# Altium PCB Router3.PcbDoc
Units mil, origin at the board's own origin, x right, y up, seen from the top; angles counter-clockwise.
Board outline 4035 x 1185 mil, 4 copper layers (Top Layer, Mid-Layer 1, Internal Plane 1, Bottom Layer); 56 components, 29 nets, 161 pads, 13 vias.
Unrouted connection lines stored in the file: 10.
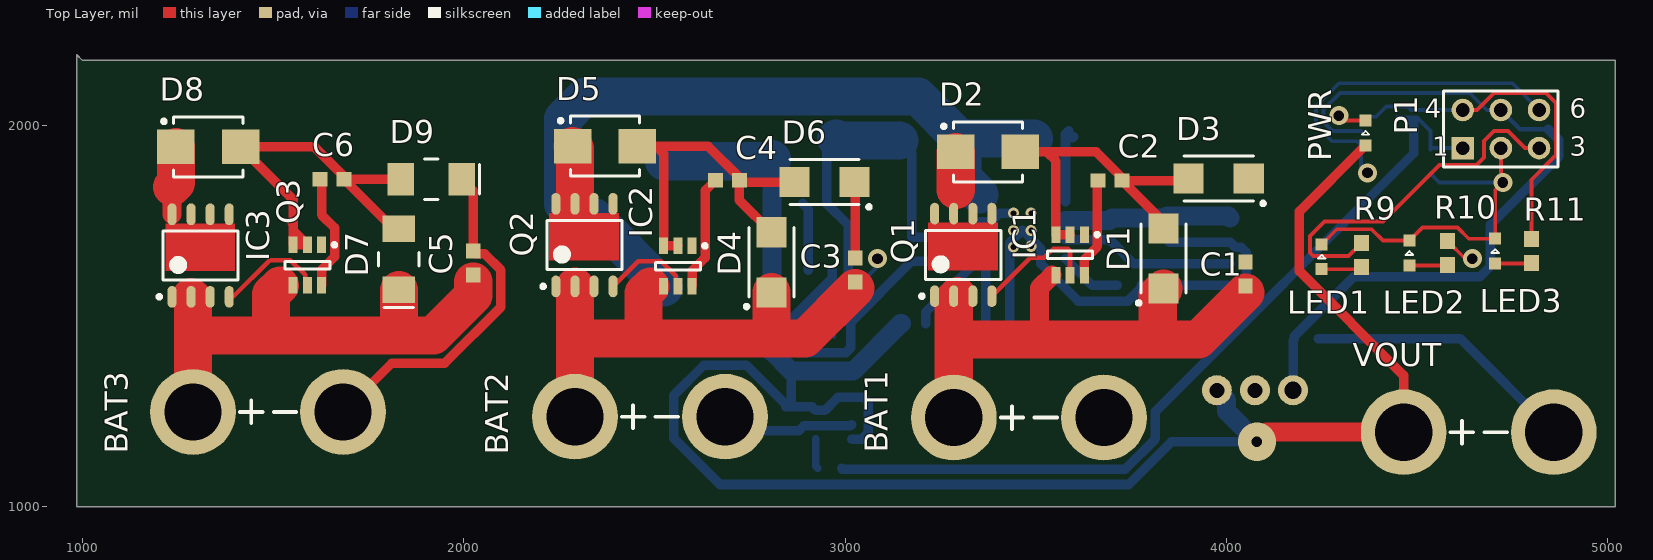
[diagram p0: Top Layer view]
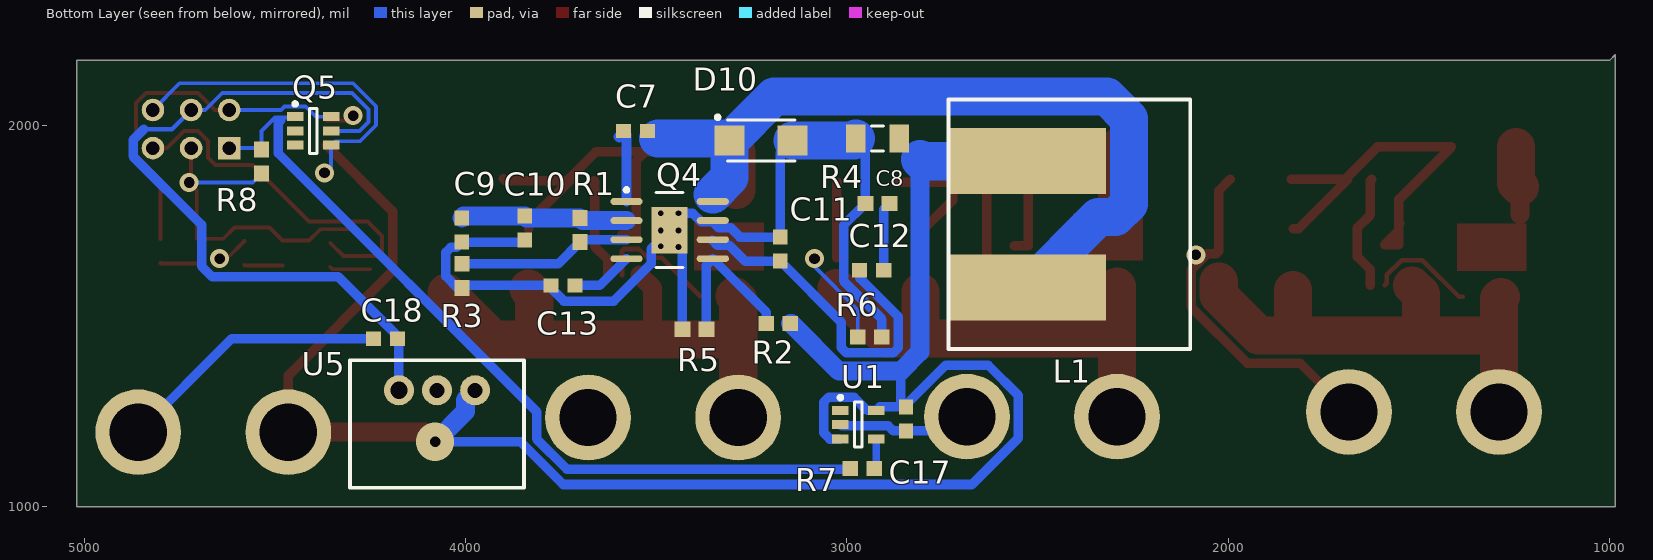
[diagram p1: Bottom Layer view, seen from below]
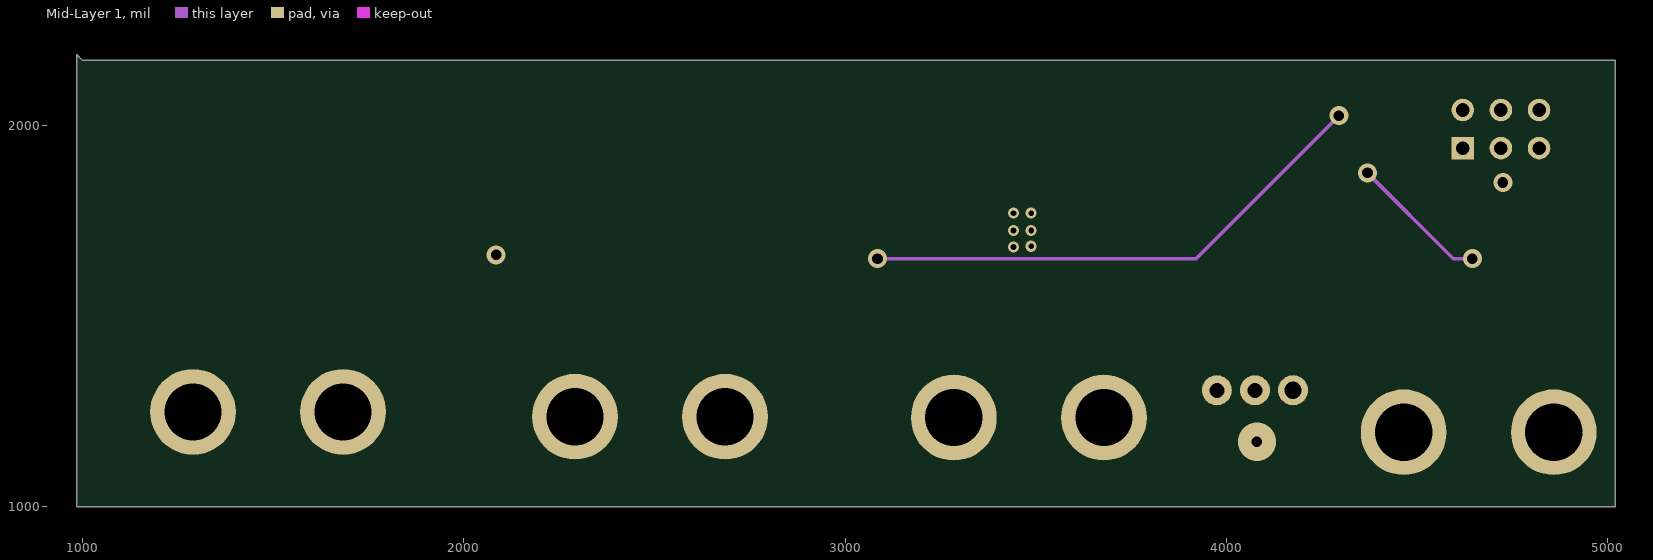
[diagram p2: Mid-Layer 1]
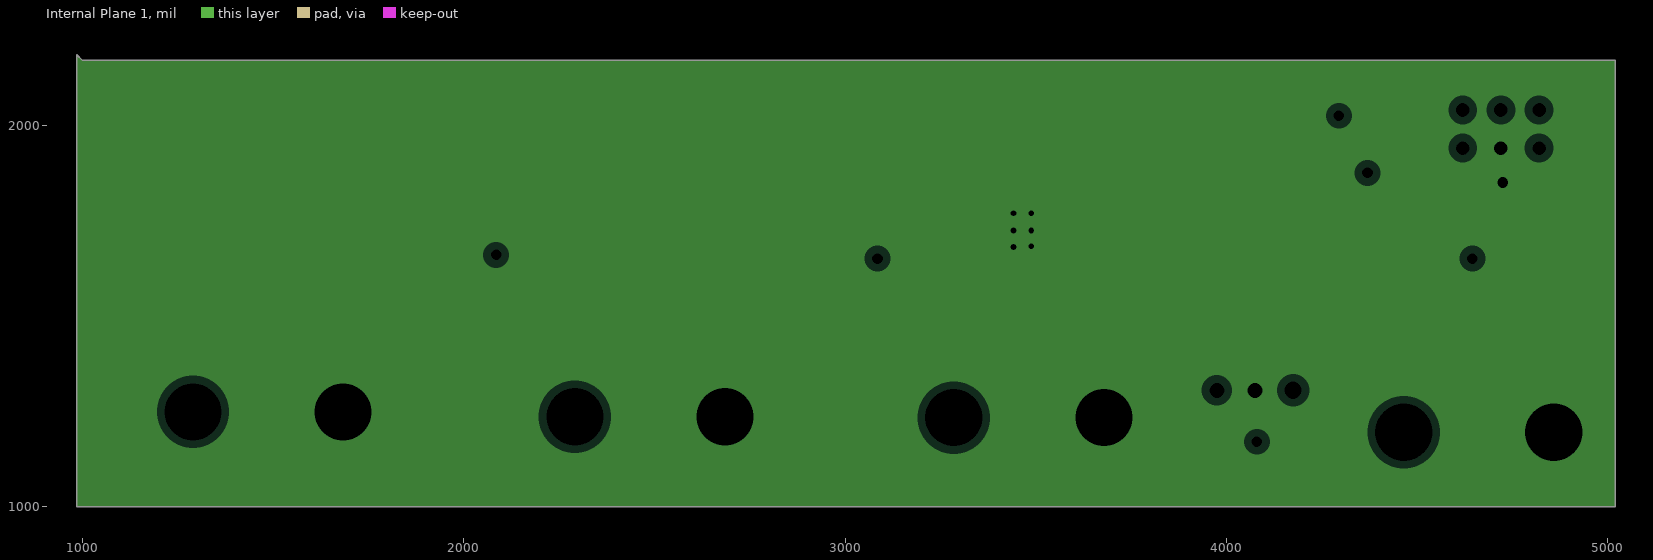
[diagram p3: Internal Plane 1, clearances drawn from the general rule]

## Layer stack, top to bottom
Top Layer: signal copper 1.4
Dielectric: core 12.6, FR-4, Dk 4.8
Mid-Layer 1: signal copper 1.4
Dielectric: prepreg 12.6, FR-4, Dk 4.8
Internal Plane 1: plane copper 1.4, net GND
Dielectric: core 12.6, FR-4, Dk 4.8
Bottom Layer: signal copper 1.4

## Board outline
985,2185 1000,2170 5020,2170 5020,1000 985,1000

## Design rules (kind name [scope] priority, off if disabled: settings)
Clearance [All] p1: gap=10
HoleSize [All] p1: absolutevalues=TRUE maxlimit=150 minlimit=1 maxpercent=80.000 minpercent=20.000
PlaneClearance [All] p1: clearance=20
PlaneConnect [All] p1: planeconnectstyle=Relief reliefexpansion=20 reliefentries=4 reliefconductorwidth=10 reliefairgap=10
PolygonConnect [All] p1: connectstyle=Relief reliefconductorwidth=10 reliefentries=4 polygonreliefangle="90 Angle" airgapwidth=10
RoutingVias [All] p1: holewidth=28 width=50 viastyle="Through Hole" minholewidth=28 minwidth=50 maxholewidth=28 maxwidth=50
SMDNeckDown [All] p1 off: percent=50.000
SilkToSolderMaskClearance [IsPad] p1: minsilkscreentomaskgap=5 clearancetoexposedcopper=TRUE
SolderMaskExpansion [All] p1: expansion=4
Width [All] p1: maxlimit=100 minlimit=10 preferedwidth=10
24 further rules are at their usual default settings.

## Classes and differential pairs
component class Switching_Regulator: C7 C8 C9 C10 C11 C12 C13 D10 L1 PWR Q4 R1 R2 R3 R4 R5 R6 VOUT
component class RouterBatteryLED: C17 C18 LED1 LED2 LED3 P1 Q5 R7 R8 R9 R10 R11 U1 U5
component class Batteries: BAT1 BAT2 BAT3 C1 C2 C3 C4 C5 C6 D1 D2 D3 D4 D5 D6 D7 D8 D9 IC1 IC2 IC3 Q1 Q2 Q3

## Components (designator, comment, footprint, x,y, rotation, side; value= is the part's Value field where it differs from the comment)
BAT1 "BATWIRE" BATWIRE12 3285.24,1233.27 r0 top
BAT2 "BATWIRE" BATWIRE12 2291.65,1235.67 r0 top
BAT3 "BATWIRE" BATWIRE12 1290,1248.27 r0 top
C1 "Cap" CAPC0603 4050,1610 r90 top
C2 "Cap" CAPC0603 3695,1855 r0 top
C3 "Cap" CAPC0603 3026.65,1620.67 r90 top
C4 "Cap" CAPC0603 2691.65,1855.67 r0 top
C5 "Cap" CAPC0603 2025,1638.27 r90 top
C6 "Cap" CAPC0603 1655,1858.27 r0 top
C7 "Cap" CAPC0603 3555,1985 r0 bottom
C8 "Cap" CAPC1206 2920,1965 r0 bottom
C9 "Cap" CAPC0603 4010,1725 r270 bottom
C10 "Cap" CAPC0603 3845,1730 r270 bottom
C11 "Cap" CAPC0603 3175,1675 r90 bottom
C12 "Cap" CAPC0603 2935,1620 r180 bottom
C13 "Cap" CAPC0603 3745,1580 r0 bottom
C17 "Cap" CAPC0603 2845,1230 r270 bottom
C18 "Cap" CAPC0603 4210,1440 r0 bottom
D1 "SS16T3G" SS16T3G 3835,1650 r90 top
D2 "SMBJ100A-13-F" SMBJ100A-13-F 3375,1930 r0 top
D3 "SS16T3G" SS16T3G 3980,1860 r180 top
D4 "SS16T3G" SS16T3G 2806.65,1640.67 r90 top
D5 "SMBJ100A-13-F" SMBJ100A-13-F 2370,1945 r0 top
D6 "SS16T3G" SS16T3G 2946.65,1850.67 r180 top
D7 "SS16T3G" SS110-TP 1830,1648.27 r90 top
D8 "SMBJ100A-13-F" SMBJ100A-13-F 1330,1943.27 r0 top
D9 "SS16T3G" SS110-TP 1915,1858.27 r180 top
D10 "DFLS160" RSX501L-20TE25 3225,1960 r180 bottom
IC1 "LM5050MK-2/NOPB" LM5050MK-2/NOPB 3590,1660 r270 top
IC2 "LM5050MK-2/NOPB" LM5050MK-2/NOPB 2561.65,1630.67 r270 top
IC3 "LM5050MK-2/NOPB" LM5050MK-2/NOPB 1590,1633.27 r270 top
L1 "37392C" 37392C 2525,1575 r180 bottom
LED1 "LED" LED0603 4250,1655 r90 top
LED2 "LED" LED0603 4480,1665 r90 top
LED3 "LED" LED0603 4705,1670 r90 top
P1 "Header 3X2A" HDR2X3_CEN 4620,1940 r0 top
PWR "LED" LED0603 4365,1980 r90 top
Q1 "TPCA8052-H(TE12LQM" TPCA8052-H(TE12LQM 3310,1660 r90 top
Q2 "TPCA8052-H(TE12LQM" TPCA8052-H(TE12LQM 2316.65,1685.67 r90 top
Q3 "TPCA8052-H(TE12LQM" TPCA8052-H(TE12LQM 1310,1658.27 r90 top
Q4 "TPS54332DDA" TPS54332DDA 3465,1725 r180 bottom
Q5 "ATTiny5 Atmel Processor" ATTiny5 4400,1985 r180 bottom
R1 "Res" RES0603 3700,1725 r270 bottom
R2 "Res" RES0603 3180,1480 r180 bottom
R3 "Res" RES0603 4010,1605 r270 bottom
R4 "Res" RES0603 2920,1795 r0 bottom
R5 "Res" RES0603 3400,1465 r180 bottom
R6 "Res" RES0603 2940,1445 r180 bottom
R7 "Res" RES0603 2960,1100 r180 bottom
R8 "Res" RES0603 4535,1905 r270 bottom
R9 "Res" RES0603 4355,1660 r270 top
R10 "Res" RES0603 4580,1665 r270 top
R11 "Res" RES0603 4800,1670 r270 top
U1 "IC OPAMP GP 600KHZ TSOT23-5" SOT95P280X100-5N 2970,1215 r180 bottom
U5 "R-78C5.0-1.0" R-78C5.0-1.0 3975,1305 r0 bottom
VOUT "BATWIRE" BATWIRE12 4465,1195 r0 top

## Footprints (in the part's own frame and the unit in brackets; to place one, negate y for a bottom-side part, rotate by r counter-clockwise, add the part's x,y. Pads: shape width x height; smd on the part's side, far side on the other; paste and mask are expansions set on the pad)
37392C [mm] "INDUCTOR 3.90UH 10.0A SMD"
  rect 10.4x4.4 smd: 0(0,8.4) 1(0,0)
  silkscreen extent -5.3,-4.1 10.8,12.5, body extent -5.5,-4.3 11,12.6, height 6.8
ATTiny5 [mm] "SOT23, 6-Leads, Body 2.90x2.80mm, Pitch 0.95mm, IPC Medium Density"
  rect 1.1x0.6 smd: 1(-1.2,0.95) 2(-1.2,0) 3(-1.2,-0.95) 4(1.2,-0.95) 5(1.2,0) 6(1.2,0.95)
  silkscreen extent -1.33,-1.5 0.25,1.92, body extent -0.87,-1.5 0.87,1.5, height 1.45
BATWIRE12 [mm] "Two 12AWG wires soldered directly to the board"
  round 5.715 hole 3.81: +(0,0) -(10,0)
  silkscreen extent 3.13,-0.75 6.87,0.75
CAPC0603 [mm] "Chip Capacitor, 2-Leads, Body 1.60x0.80mm, IPC Medium Density"
  rect 1x0.95 smd: 1(-0.8,0) 2(0.8,0)
  body extent -0.88,-0.48 0.87,0.48, height 0.8
CAPC1206 [mm] "Chip Capacitor, 2-Leads, Body 3.20x1.60mm, IPC Medium Density"
  rect 1.3x1.85 smd: 1(-1.45,0) 2(1.45,0)
  silkscreen extent -0.4,-0.83 0.4,0.82, body extent -1.7,-0.9 1.7,0.9, height 1.8
HDR2X3_CEN [mm] "Connector; Header; 3x2 Position"
  rect 1.5x1.5 hole 0.9: 1(0,0)
  round 1.5 hole 0.9: 2(2.54,0) 3(5.08,0) 4(0,2.54) 5(2.54,2.54) 6(5.08,2.54)
  silkscreen extent -1.27,-1.27 6.35,3.81
LED0603 [mm] "Chip LED, 2-Leads, Body 1.60x0.80mm, IPC Medium Density"
  rect 0.8x0.8 smd: A(-0.825,0) C(0.825,0)
  silkscreen extent -0.13,-0.25 0.13,0.25, body extent -0.88,-0.48 0.87,0.47, height 0.8
LM5050MK-2/NOPB [mm] "IC OR CTRLR N+1 6SOT"
  rect 1.1x0.6 smd: 1(-1.35,0.95) 2(-1.35,0) 3(-1.35,-0.95) 4(1.35,-0.95) 5(1.35,0) 6(1.35,0.95)
  silkscreen extent -1.47,-1.5 0.25,1.93, body extent -0.87,-1.52 0.87,1.53, height 1.1
R-78C5.0-1.0 [mm] "CONV DC/DC 1A 5V OUT SIP VERT"
  round 2 hole 1: 1(0,0) 2(2.54,0)
  round 2 hole 1.15: 3(5.08,0)
  silkscreen extent -3.26,-2 8.34,6.5, body extent -3.2,-1.9 8.3,6.5, height 10.8
RES0603 [mm] "Chip Resistor, 2-Leads, Body 1.60x0.80mm, IPC Medium Density"
  rect 1.05x1 smd: 1(-0.8,0) 2(0.8,0)
  body extent -0.88,-0.48 0.87,0.47, height 0.8
RSX501L-20TE25 [mm] "DIODE SCHOTTKY 20V 5A PMDS"
  rect 2x2 smd: A(2.1,0) C(-2.1,0)
  silkscreen extent -3.03,-1.35 2.25,1.67, body extent -2.25,-1.3 2.25,1.3, height 2
SMBJ100A-13-F [mm] "TVS DIODE 100VWM 162VC SMB"
  rect 2.5x2.3 smd: A(2.15,0) C(-2.15,0)
  silkscreen extent -3.07,-2 2.3,2, body extent -2.29,-1.97 2.28,1.97, height 2.62
SOT95P280X100-5N [mm] "SOT23, 5-Leads, Body 2.90x2.80mm, Pitch 0.95mm, IPC Medium Density"
  rect 1.1x0.6 smd: 1(-1.2,0.95) 2(-1.2,0) 3(-1.2,-0.95) 4(1.2,-0.95) 5(1.2,0.95)
  silkscreen extent -1.33,-1.5 0.25,1.92, body extent -0.87,-1.5 0.87,1.5, height 1
SS16T3G [mm] "DIODE SCHOTTKY 60V 1A SMA"
  rect 2x2 smd: A(2,0) C(-2,0)
  silkscreen extent -3.07,-1.5 2.3,1.77, body extent -2.29,-1.46 2.28,1.46, height 2.2
SS110-TP [mil] "DIODE SCHOTTKY 100V 1A SMA"
  rect 70x85 smd: A(80,0) C(-80,0)
  silkscreen extent -127,-53 18,53, body extent -84,-52 84,52, height 116
TPCA8052-H(TE12LQM [mm] "MOSFET N-CH 40V 20A 8SOP"
  oval 1.45x0.6 smd: D(2.75,-1.905) D(2.75,-0.635) D(2.75,0.635) D(2.75,1.905) G(-2.75,-1.905) S(-2.75,-0.635) S(-2.75,0.635) S(-2.75,1.905)
  Top Layer region: -1.027,-2.3 2.148,-2.3 2.148,2.35 -1.027,2.35
  silkscreen extent -2.87,-2.5 1.62,2.88, body extent -2.5,-2.5 2.5,2.5, height 0.95
TPS54332DDA [mm] "IC REG BUCK ADJ 3.5A 8SOPWRPAD"
  oval 2.15x0.45 smd: 1(-2.875,1.905) 2(-2.875,0.635) 3(-2.875,-0.635) 4(-2.875,-1.905) 5(2.875,-1.905) 6(2.875,-0.635) 7(2.875,0.635) 8(2.875,1.905)
  rect 2.4x3.1 smd: 7(0,0)
  silkscreen extent -3,-2.5 0.9,2.8, body extent -2,-2.5 2,2.5, height 1.7

## Part data
BAT1 BAT2 BAT3 VOUT: "Two large gauge leads soldered directly to the board."
D1 D3 D4 D6 D7 D9: "DIODE SCHOTTKY 60V 1A SMA"
D2 D5 D8: "TVS DIODE 100VWM 162VC SMB"
D10: "1.0A Surface Mount Schottky Barrier Rectifier"
IC1 IC2 IC3: "IC OR CTRLR N+1 6SOT"
L1: "INDUCTOR 3.90UH 10.0A SMD"
P1: "Header, 3-Pin, Dual row"
Q1 Q2 Q3: library part TPCA8052-H, "MOSFET N-CH 40V 20A 8SOP"
Q4: "IC REG BUCK ADJ 3.5A 8SOPWRPAD"
U5: "CONV DC/DC 1A 5V OUT SIP VERT"

## Via types
v1: diameter 29, hole 15, Top Layer to Bottom Layer, tented both sides, 6 vias
v2: diameter 50, hole 28, Top Layer to Bottom Layer, 5 vias
v3: diameter 100, hole 28, Top Layer to Bottom Layer, 1 vias
v4: diameter 50, hole 28, Mid-Layer 1 to Bottom Layer, 1 vias

## Nets (pads, with @x,y where several pads share a name; then routed paths per layer and width w, separated by ;. In a path a pad name is that pad's centre, name@x,y a point inside that pad or via, vN(x,y) a via of type N, cw(c..) or ccw(c..) an arc to the next point about the centre after c; other vN are vias at no path point)
5V: C18.1 P1.5 Q5.5 U5.3 | length 1965.5
  Bottom Layer w10: Q5.5 4278.43,1985 4255,2008.43 4255,2041.57 4297.96,2084.53 4638.44,2084.53 4682.97,2040 P1.5
  Bottom Layer w12: P1.5 4770,1990 4843.58,1990
  Bottom Layer w25: U5.3 4175,1436.5 C18.1 4178.5,1447.21 4333.79,1602.5 4664.68,1602.5 4692.5,1630.32 4692.5,1738.92 4872.03,1918.45 4872.03,1961.55 4843.58,1990
12V: C8.1 C17.1 L1.0 PWR.A R2.2 U1.3 U1.5 U5.1 VOUT.+ | length 5299
  Top Layer w25: PWR.A 4191.75,1774.27 4191.75,1617.45 4465,1344.2 VOUT.+
  Top Layer w50: v3(4080,1170) 4105,1195 VOUT.+
  Bottom Layer w25: 2858.84,1355.32 2858.84,1275.34 C17.1 ; U1.3@3017.24,1176.91 3044.44,1176.91 3061.4,1193.87 3061.4,1273.53 3048.22,1286.71 2981.55,1286.71 2947.24,1252.4 U1.5 2913.66,1261.5 C17.1 ; v3(4080,1170) 3856.08,1170 3743.9,1057.81 2672.29,1057.81 2550.35,1179.75 2550.35,1291.59 2629.44,1370.67 2741.27,1370.67 2845,1266.94 C17.1
  Bottom Layer w50: 2808.62,1910.71 2808.62,1405.53 2858.84,1355.32 3021.16,1355.32 3145.85,1480 R2.2 ; U5.1 4000.63,1279.37 4000.63,1249.37 v3(4080,1170)
  Bottom Layer w100: L1.0 2803.62,1905.71 2808.62,1910.71
BATT1: BAT1.+ C1.1 D1.C IC1.4 Q1.S | length 1460
  Top Layer w50: 3510,1438.27 3510,1573.66 IC1.4@3543.19,1606.85
  Top Layer w100: BAT1.+ 3285.24,1438.27 ; Q1.S@3295,1551.73 3285.24,1541.97 3285.24,1438.27 ; D1.C 3820,1556.26 3820,1438.27 ; C1.1@4050,1561.81 3926.46,1438.27 3820,1438.27 ; 3285.24,1438.27 3510,1438.27 3820,1438.27
BATT2: BAT2.+ C3.1 D4.C IC2.4 Q2.S | length 1397
  Top Layer w100: BAT2.+ 2291.65,1440.67 ; Q2.S@2291.65,1577.4 2291.65,1440.67 ; 2489.84,1577.52 2471.65,1559.33 2471.65,1440.67 ; D4.C 2806.65,1440.67 ; C3.1@3026.65,1572.48 2894.84,1440.67 2806.65,1440.67 ; 2291.65,1440.67 2471.65,1440.67 ; 2471.65,1440.67 2806.65,1440.67
BATT3: BAT3.+ C5.1 D7.C IC3.4 Q3.S | length 1380.6
  Top Layer w100: Q3.S@1285,1550 1290,1545 1290,1448.27 ; BAT3.+ 1290,1448.27 ; 1518.19,1580.12 1495,1556.93 1495,1448.27 ; D7.C 1830,1448.27 ; C5.1@2025,1590.08 2025,1553.27 1920,1448.27 1830,1448.27 ; 1290,1448.27 1495,1448.27 ; 1495,1448.27 1830,1448.27
GND: BAT1.- BAT2.- BAT3.- C1.2 C3.2 C5.2 C8.2 C9.2 C10.2 C11.2 C13.2 C17.2 C18.2 D3.C D6.C D9.C D10.A LED1.C LED2.C LED3.C P1.2 Q4.7 R3.2 R4.2 R5.1 R6.2 R8.2 U1.2 U5.2 VOUT.- | length 5728.3
  Top Layer w10: LED1.C 4289.69,1727.17 4380.9,1727.17 4410.58,1697.48 LED2.C 4514.69,1732.17 4605.9,1732.17 4635.58,1702.48 LED3.C 4705,1830 v2(4725,1850) 4720,1855 P1.2
  Top Layer w25: BAT3.- 1811.2,1375.77 1950.03,1375.77 2097.5,1523.24 2097.5,1620.11 2055.03,1662.58 2032.19,1662.58 C5.2 2025,1828.27 D9.C ; D6.C 3026.65,1849.41 C3.2
  Bottom Layer w10: R8.2 4558.5,1850 v2(4725,1850)
  Bottom Layer w25: BAT2.- 2722.52,1198.5 C17.2 2878.38,1198.5 2891.78,1211.91 3014.15,1211.91 U1.2 ; R6.2 2908.5,1491.8 3008.68,1591.98 3008.68,1737.81 R4.2 2951.5,1939.41 C8.2 ; D10.A 3175,1927.32 C11.2 3280.49,1706.5 3305.36,1731.36 3336.81,1731.36 3351.81,1746.36 3381.84,1746.36 3404.77,1769.29 v1(3442,1769.29) ; R5.1 3431.5,1691.5 Q4.7@3453.01,1713.01 ; Q4.7@3465,1725 3513.37,1676.63 3513.37,1637.01 3611.58,1538.8 3742.51,1538.8 3776.5,1572.79 C13.2 4003.5,1580 R3.2 4021.37,1573.5 4052.18,1604.32 4052.18,1666.49 4039,1679.67 4023.84,1679.67 C9.2 C10.2@3850,1693.5 ; C18.2 4613.7,1440 VOUT.-
  Bottom Layer w100: C8.2 2982.09,1960 D10.A
  other v1: 3442,1680.71 3488,1682.68 3442,1724.02 3488,1724.02 3488,1769.29
NetC2_2: C2.2 D1.A D2.A D3.A IC1.2 IC1.3 | length 913.8
  Top Layer w25: D2.A 3530,1930 ; IC1.2 IC1.3 3552.6,1907.4 3530,1930 ; D1.A 3835,1746.5 C2.2 ; D3.A 3896.26,1855 C2.2 ; 3530,1930 3658.71,1930 3726.5,1862.21 C2.2
NetC4_2: C4.2 D4.A D5.A D6.A IC2.2 IC2.3 | length 934
  Top Layer w25: D5.A 2505,1945 ; IC2.2 IC2.3 2524.25,1925.75 2505,1945 ; D4.A 2723.15,1802.91 C4.2 ; D6.A 2728.15,1850.67 C4.2 ; 2505,1945 2641.03,1945 2723.15,1862.88 C4.2
NetC6_2: C6.2 D7.A D8.A D9.A IC3.2 IC3.3 | length 1065.1
  Top Layer w25: 1550,1743.27 1552.6,1740.67 ; D7.A 1816.5,1728.27 C6.2 ; D9.A C6.2 ; 1552.6,1723.82 1552.6,1740.67 ; 1552.6,1723.82 IC3.3 IC3.2 1552.6,1723.82 ; 1552.6,1740.67 1552.6,1805.32 D8.A 1608.71,1943.27 1686.5,1865.48 C6.2
NetC7_1: C7.1 D10.C L1.1 Q4.8 | length 2044.3
  Bottom Layer w100: L1.1 2340.91,1759.09 2295.42,1759.09 2260.28,1794.24 2260.28,2017.18 2318.1,2075 3190.92,2075 D10.C@3305.92,1960 ; D10.C@3305.87,1965 3495,1965 ; D10.C 3307.68,1862.99 3351.81,1818.86
NetC7_2: C7.2 Q4.1 | length 193.1
  Bottom Layer w25: Q4.1 3578.19,1976.69 C7.2 ; C7.2@3596.69,1966.69 C7.2@3600,1970
NetC11_1: C11.1 C12.1 Q4.6 | length 901.2
  Bottom Layer w25: C12.1 2966.5,1599.29 2865.33,1498.13 2865.33,1416 2878.51,1402.82 3001.49,1402.82 3014.67,1416 3014.67,1483.17 C11.1 3267,1643.5 3308.5,1685 3339.95,1685 Q4.6@3353.38,1698.43
NetC12_2: C12.2 R4.1 | length 181.2
  Bottom Layer w25: R4.1 2903.5,1780 C12.2
NetC13_1: C13.1 Q4.4 | length 164.3
  Bottom Layer w25: Q4.4 3648.19,1580 C13.1
NetIC1_5: IC1.5 Q1.G | length 322
  Top Layer w12: Q1.G 3485.45,1652.18 3522.18,1652.18 3545.5,1675.5 3585,1675.5 3590,1670.5 IC1.5
NetIC2_5: IC2.5 Q2.G | length 237.3
  Top Layer w12: Q2.G 2457.77,1643.52 2517.18,1643.52 2555.84,1604.86 2555.84,1583.33 IC2.5
NetIC3_5: IC3.5 Q3.G | length 284.8
  Top Layer w12: Q3.G 1394.73,1550 1490.85,1646.12 1545.53,1646.12 1584.19,1607.46 1584.19,1585.93 IC3.5
NetLED1_A: LED1.A R9.2 | length 107.5
  Top Layer w10: LED1.A 4349.02,1622.52 R9.2
NetLED2_A: LED2.A R10.2 | length 100.4
  Top Layer w10: LED2.A 4579.02,1632.52 R10.2
NetLED3_A: LED3.A R11.2 | length 95.4
  Top Layer w10: LED3.A 4799.02,1637.52 R11.2
NetPWR_C: PWR.C R6.1 | length 1692.5
  Top Layer w10: v2(4295,2025) 4307.52,2012.48 PWR.C
  Mid-Layer 1 w10: v2(3085,1650) 3920,1650 v2(4295,2025)
  Bottom Layer w10: R6.1 2971.5,1515.91 3085,1629.41 v2(3085,1650)
  other v4: 2085,1660
NetQ4_3: Q4.3 R1.2 R3.1 | length 458.1
  Bottom Layer w25: Q4.3 3693.5,1700 R1.2 3757.01,1636.5 R3.1
NetQ4_5: Q4.5 R2.1 R5.2 | length 420
  Bottom Layer w25: R2.1 3211.5,1509.69 Q4.5 3368.5,1633.31 R5.2
NetR7_2: R7.2 U1.4 | length 80
  Bottom Layer w20: U1.4 2922.76,1105.75 R7.2
PB2: P1.6 Q5.4 R10.1 | length 1360.3
  Top Layer w10: R10.1 4626.5,1650 v2(4645,1650)
  Mid-Layer 1 w10: v2(4370,1875) 4595,1650 v2(4645,1650)
  Bottom Layer w10: v2(4370,1875) 4352.76,1892.24 Q5.4 4342.16,1958.19 4276.96,1958.19 4235,2000.15 4235,2049.85 4295.15,2110 4750,2110 P1.6
PB3/RESET: P1.4 Q5.6 R11.1 | length 939.6
  Top Layer w10: P1.4 4657.03,2040 4701.56,2084.53 4838.44,2084.53 4864.53,2058.44 4864.53,1921.56 4800,1857.03 R11.1
  Bottom Layer w10: Q5.6 4392.57,2022.4 4419.38,2049.21 4475.11,2049.21 4484.32,2040 P1.4
RAIL+: C2.1 C4.1 C6.1 C9.1 C10.1 D2.C D5.C D8.C IC1.6 IC2.6 IC3.6 Q1.D Q2.D Q3.D Q4.2 R1.1 | length 1747.7
  Top Layer w25: C6.1 1627.4,1854.37 1627.4,1764.88 1661.71,1730.57 1661.71,1655.44 1627.4,1621.13 IC3.6 ; IC2.6 2599.06,1618.54 2633.37,1652.85 2633.37,1828.88 C4.1 ; IC1.6 3627.4,1647.87 3661.71,1682.18 3661.71,1853.21 C2.1
  Top Layer w50: Q3.D@1235,1766.54 1235,1838.27
  Top Layer w100: 1235,1838.27 1245.35,1848.62 D8.C ; D5.C 2291.65,1938.7 Q2.D@2291.65,1793.94 ; 3290.35,1830.35 D2.C
  Bottom Layer w50: Q4.2 3693.5,1750 R1.1 3840,1756.5 C10.1 4005,1761.5 C9.1
TPICLK/PB1: P1.3 R9.1 | length 956.2
  Top Layer w10: R9.1 4320.24,1656.73 4228.04,1656.73 4219.25,1665.52 4219.25,1709.44 4256.98,1747.17 4410.67,1747.17 4558.98,1895.47 4655.74,1895.47 4675.47,1915.2 4675.47,1958.44 4701.56,1984.53 4738.44,1984.53 4782.97,1940 P1.3
TPIDATA/PB0: P1.1 Q5.1 R7.1 R8.1 | length 2219.6
  Top Layer w10: P1.1 P1.1@4625,1935
  Bottom Layer w10: Q5.1 4449.65,2020 4500,2020 4535,1985 R8.1 4538.5,1940 P1.1
  Bottom Layer w25: R7.1 2993.23,1098.27 3734.85,1098.27 3813.94,1177.35 3813.94,1249.01 4491.4,1926.47 4491.4,2006.13 4485.03,2012.5
pads on no net: IC1.1 IC2.1 IC3.1 Q5.2 Q5.3 U1.1

## Polygon pours and split planes (outlines as drawn)
GND on Internal Plane 1 (split plane): 1000,2170 5020,2170 5020,1000 985,1000 985,2185

## Text inside footprints (layer, text, board x,y; h text height)
P1: Top Overlay "4" at 4520,2020 h50; Top Overlay "1" at 4540,1920 h50; Top Overlay "3" at 4900,1920 h50; Top Overlay "6" at 4900,2020 h50